# Altium PCB giao-dong-led.PcbDoc
Units mil, origin at the board's own origin, x right, y up, seen from the top; angles counter-clockwise.
Board outline 1860.03 x 795.03 mil, 2 copper layers (Top Layer, Bottom Layer); 17 components, 12 nets, 37 pads, 0 vias.
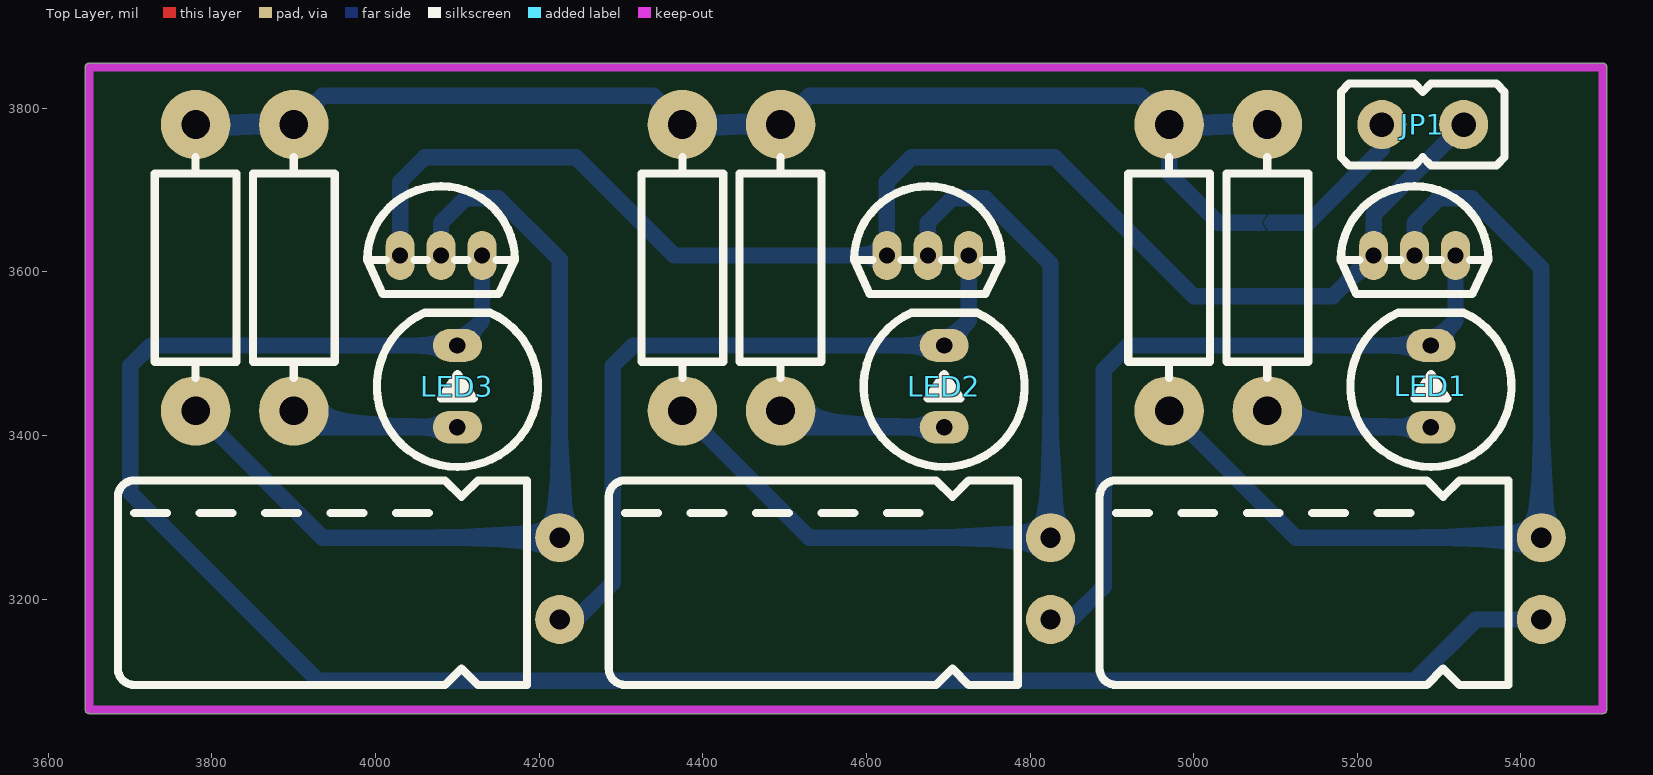
[diagram p0: Top Layer view]
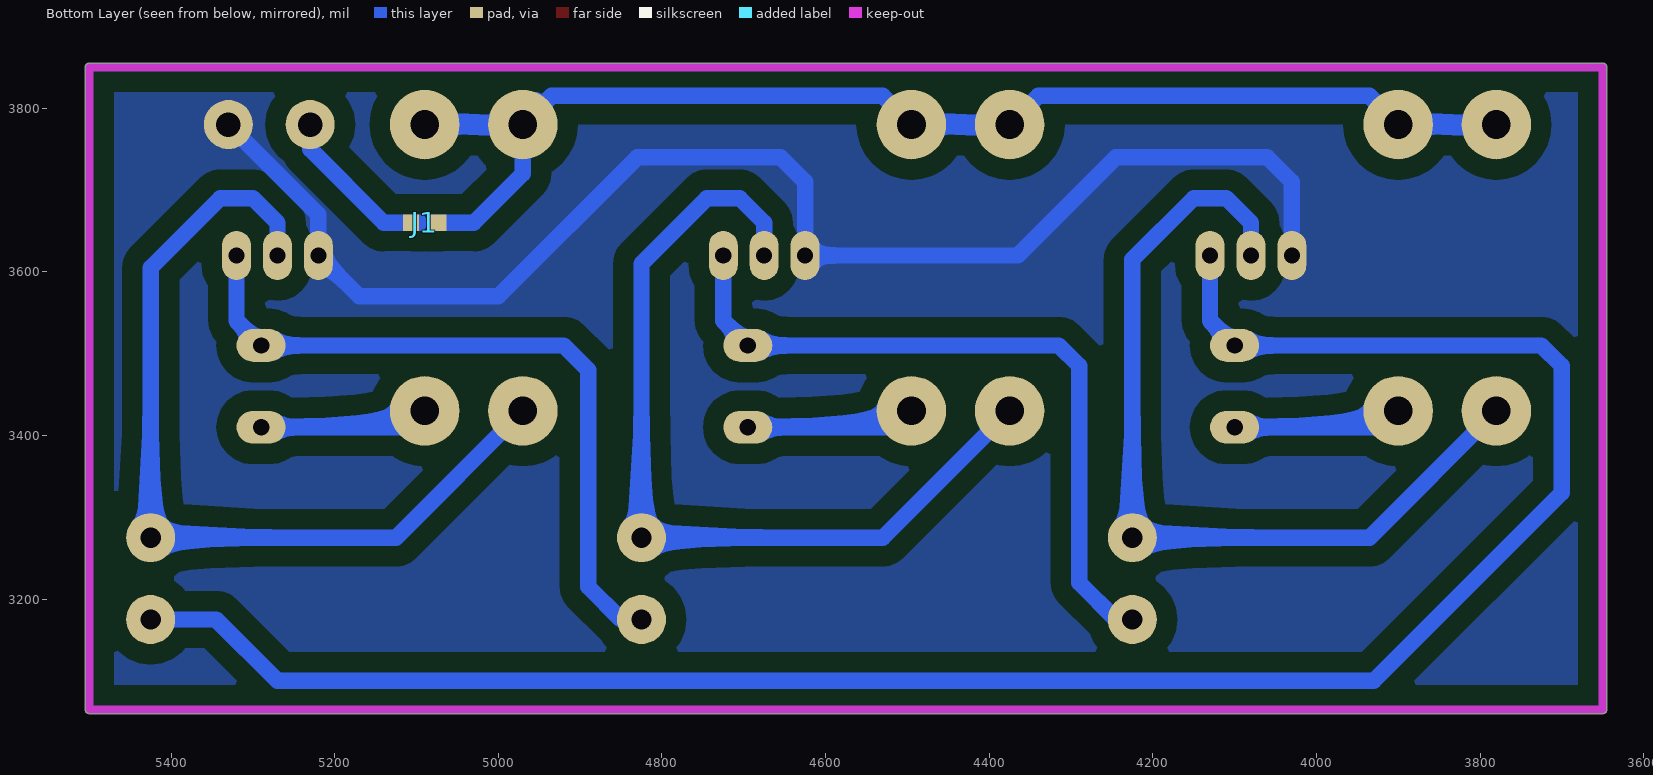
[diagram p1: Bottom Layer view, seen from below]

## Layer stack, top to bottom
Top Solder: solder mask 0.4, Solder Resist, Dk 3.5
Top Layer: signal copper 1.4
Dielectric 1: dielectric 12.6, FR-4, Dk 4.8
Bottom Layer: signal copper 1.4
Bottom Solder: solder mask 0.4, Solder Resist, Dk 3.5

## Board outline
3644.99,3065 ccw(c3650,3065) 3650,3059.99 5500,3059.99 ccw(c5500,3065) 5505.02,3065 5505.02,3850 ccw(c5500,3850) 5500,3855.01 3650,3855.01 ccw(c3650,3850) 3644.99,3850

## Design rules (kind name [scope] priority, off if disabled: settings)
Clearance [All] p1: gap=25 ignorepadtopadclearanceinfootprint=FALSE
PlaneConnect [All] p1: planeconnectstyle=Direct reliefexpansion=20 reliefentries=4 reliefconductorwidth=10 reliefairgap=10
PolygonConnect [All] p1: connectstyle=Direct reliefconductorwidth=10 reliefentries=4 polygonreliefangle="90 Angle" airgapwidth=10
RoutingVias [All] p1: holewidth=28 width=50 viastyle="Through Hole" minholewidth=28 minwidth=50 maxholewidth=28 maxwidth=50
SolderMaskExpansion [All] p1: expansion=4
Width [All] p1: maxlimit=30 minlimit=10 preferedwidth=20 toplayer_maxwidth=10 toplayer_prefwidth=10 minimp=50.000000 maximp=50.000000 favimp=50.000000
29 further rules are at their usual default settings.

## Classes and differential pairs
component class giao-dong-led: J1 JP1 LED1 LED3 Q2 Q3 R1 R2 R4 R5 R6

## Components (designator, comment, footprint, x,y, rotation, side; value= is the part's Value field where it differs from the comment)
C1 "" POL_250MIL_HORIZONTAL 4225,3445 r90 top
C2 "" POL_250MIL_HORIZONTAL 4825,3445 r90 top
C3 "" POL_250MIL_HORIZONTAL 5425,3445 r90 top
J1 "" S_JP_3 5090,3660 r0 bottom
JP1 "" JP_2 5280,3780 r0 top
LED1 "" LED-200mil 5290,3460 r90 top
LED2 "" LED-200mil 4695,3460 r90 top
LED3 "" LED-200mil 4100,3460 r90 top
Q1 "" S9014 4080,3620 r180 top
Q2 "" S9014 4675,3620 r180 top
Q3 "" S9014 5270,3620 r180 top
R1 "" RES 5090,3605 r90 top
R2 "" RES 4495,3605 r90 top
R3 "" RES 3900,3605 r90 top
R4 "" RES 4970,3605 r90 top
R5 "" RES 4375,3605 r90 top
R6 "" RES 3780,3605 r90 top

## Footprints (in the part's own frame and the unit in brackets; to place one, negate y for a bottom-side part, rotate by r counter-clockwise, add the part's x,y. Pads: shape width x height; smd on the part's side, far side on the other; paste and mask are expansions set on the pad)
JP_2 [mil] "jump"
  round 60 hole 30: 1(-50,0) 2(50,0)
  silkscreen extent -100,-50 100,50
LED-200mil [mil] "LED 2 chân size 200x350-mil"
  oval 40x60 hole 20: A(-50,0) C(50,0)
  silkscreen extent -98,-98 90,98
POL_250MIL_HORIZONTAL [mil]
  round 60 hole 25: +(-270,0) -(-170,0)
  silkscreen extent -350,40 -100,540
RES [mil]
  round 85 hole 35: 1(-175,0) 2(175,0)
  silkscreen extent -135,-50 135,50
S9014 [mm]
  oval 0.9x1.524 hole 0.5: 1(1.27,0) 2(0,0) 3(-1.27,0)
  silkscreen extent -2.29,-2.15 2.29,1.2
S_JP_3 [mm]
  rect 0.5x0.5 smd: 1(-0.425,0) 2(0.425,0)
  Top Layer region: 0.025,0.25 -0.125,0 0.025,-0.25 0.425,-0.25 0.425,0.25
  Top Layer region: -0.025,0.25
  Top Layer region: -0.575,0.25 -0.575,-0.25 -0.025,-0.25 -0.175,0 -0.025,0.25
  Top Layer region: -0.525,-1.25
  Top Layer region: -0.225,0.25

## Part data
C1 C2 C3: library part Pol-Cap, "T? di?n phân c?c"
J1: library part "Solderable Jump"
JP1: library part JP_2
LED1 LED2 LED3: library part LED-200mil
Q1 Q2 Q3: library part S9014
R1 R2 R3 R4 R5 R6: library part RES, "di?n tr? size nh?"

## Nets (pads, with @x,y where several pads share a name; then routed paths per layer and width w, separated by ;. In a path a pad name is that pad's centre, name@x,y a point inside that pad or via, vN(x,y) a via of type N, cw(c..) or ccw(c..) an arc to the next point about the centre after c; other vN are vias at no path point)
+5: J1.2 JP1.1 | length 190.5
  Bottom Layer w19.68: J1.2 5140,3660
  Bottom Layer w20: 5140,3660 5230,3750 JP1.1
GND: JP1.2 Q1.1 Q2.1 Q3.1 | length 1741.2
  Bottom Layer w20: Q1.1 4030,3710 4060,3740 4245,3740 4365,3620 Q2.1 4625,3710 4655,3740 4830,3740 5000,3570 5170,3570 Q3.1 5220,3670 JP1.2
NetC1_+: C1.+ LED2.C Q2.3 | length 886.4
  Bottom Layer w20: C1.+ 4245,3175 4290,3220 4290,3485 4315,3510 LED2.C 4725,3540 Q2.3
NetC1_-: C1.- Q1.2 R6.1 | length 1077.7
  Bottom Layer w20: R6.1 3935,3275 C1.- 4225,3615 4150,3690 4110,3690 4080,3660 Q1.2
NetC2_+: C2.+ LED1.C Q3.3 | length 881.4
  Bottom Layer w20: C2.+ 4850,3175 4890,3215 4890,3480 4920,3510 LED1.C 5320,3540 Q3.3
NetC2_-: C2.- Q2.2 R5.1 | length 1084.8
  Bottom Layer w20: R5.1 4530,3275 C2.- 4825,3610 4745,3690 4705,3690 4675,3660 Q2.2
NetC3_+: C3.+ LED3.C Q1.3 | length 2539.1
  Bottom Layer w20: Q1.3 4130,3540 LED3.C 3725,3510 3700,3485 3700,3330 3930,3100 5270,3100 5345,3175 C3.+
NetC3_-: C3.- Q3.2 R4.1 | length 1091.8
  Bottom Layer w20: R4.1 5125,3275 C3.- 5425,3605 5340,3690 5300,3690 5270,3660 Q3.2
NetJ1_1: J1.1 R1.2 R2.2 R3.2 R4.2 R5.2 R6.2 | length 1655.6
  Bottom Layer w0: R6.2@3750,3810 R6.2
  Bottom Layer w19.68: 5030,3660 J1.1@5067.36,3660
  Bottom Layer w20: R6.2 R3.2 3935,3815 4340,3815 R5.2 R2.2 4530,3815 4935,3815 R4.2 ; R4.2@4970.83,3789.93 R4.2@4970,3790.91 ; 5030,3660 4970,3720 R4.2 ; R1.2 R4.2 ; R4.2 R4.2@4970,3790.91 ; R4.2@4970,3790.91 4953.85,3810 4970,3793.85 R4.2@4970,3790.91
NetLED1_A: LED1.A R1.1 | length 218.3
  Bottom Layer w20: R1.1 5110,3410 LED1.A ; R1.1@5120,3430 R1.1@5120,3440
NetLED2_A: LED2.A R2.1 | length 222.4
  Bottom Layer w20: R2.1@4505,3440 R2.1 4515,3410 LED2.A
NetLED3_A: LED3.A R3.1 | length 222.4
  Bottom Layer w20: R3.1@3910,3440 R3.1 3920,3410 LED3.A

## Polygon pours and split planes (outlines as drawn)
GND on Bottom Layer "Bottom Layer-GND" (solid, pour order 6): 3650,3850 3650,3065 5500,3065 5500,3850

## Keep-outs
Keep-Out Layer:
  lines w10: 3650,3065 3650,3850 4050,3850 5340,3850 5500,3850 5500,3065 3650,3065

## Other copper
Bottom Layer:
  region: 4940,3825